# EAGLE board CT_schematic (EAGLE 7.6.0)

Size 100 x 80 mm. Coordinates in mm from the lower left corner, seen from the top.
Outline: 0,0 100,0 100,80 0,80 0,0
Copper layers (1*16): Top 0.035mm / dielectric 1.5mm / Bottom 0.035mm
Design rules "default": minimum track width 10mil, minimum drill 24mil, track to track 8mil, track to pad 8mil, pad to pad 8mil, via to via 8mil, smd to smd 8mil, copper to edge 40mil, drill to drill 8mil, minimum pad ring 10mil, minimum via ring 8mil, stop-mask expansion 4mil, vias tented up to drill 0mil, thermal gap 10mil

## Footprints (pad centres in the part's own frame; a part is rotated, then mirrored left to right if it is on the bottom)
C0603 = smd 0.8 x 0.8: 1 -0.762,0; 2 0.762,0
C0402 = smd 0.5 x 0.5: 1 -0.508,0; 2 0.508,0
C1206 = smd 1.3 x 1.6: 1 -1.524,0; 2 1.524,0
C0805 = smd 1.2 x 1.3: 1 -1.016,0; 2 1.016,0
EXV-9H = smd 3.505 x 1.676: 1 -2.857,0; 2 2.857,0
L0603 = smd 0.8 x 0.8: 1 -0.762,0; 2 0.762,0
PJ-037B_PACKAGE = drill 3.7 square: 1 12,0 | drill 3.2 square: 2 6,0
R0603 = smd 0.8 x 0.8: 1 -0.762,0; 2 0.762,0
LQFP48 = smd 0.3 x 1.2: 1 -2.75,-4.25; 2 -2.25,-4.25; 3 -1.75,-4.25; 4 -1.25,-4.25; 5 -0.75,-4.25; 6 -0.25,-4.25; 7 0.25,-4.25; 8 0.75,-4.25; 9 1.25,-4.25; 10 1.75,-4.25; 11 2.25,-4.25; 12 2.75,-4.25; 25 2.75,4.25; 26 2.25,4.25; 27 1.75,4.25; 28 1.25,4.25; 29 0.75,4.25; 30 0.25,4.25; 31 -0.25,4.25; 32 -0.75,4.25; 33 -1.25,4.25; 34 -1.75,4.25; 35 -2.25,4.25; 36 -2.75,4.25 | smd 1.2 x 0.3: 13 4.25,-2.75; 14 4.25,-2.25; 15 4.25,-1.75; 16 4.25,-1.25; 17 4.25,-0.75; 18 4.25,-0.25; 19 4.25,0.25; 20 4.25,0.75; 21 4.25,1.25; 22 4.25,1.75; 23 4.25,2.25; 24 4.25,2.75; 37 -4.25,2.75; 38 -4.25,2.25; 39 -4.25,1.75; 40 -4.25,1.25; 41 -4.25,0.75; 42 -4.25,0.25; 43 -4.25,-0.25; 44 -4.25,-0.75; 45 -4.25,-1.25; 46 -4.25,-1.75; 47 -4.25,-2.25; 48 -4.25,-2.75
SOIC-8 = smd 1.6 x 0.6: 1 -2.7,1.905 | smd 1.55 x 0.6: 2 -2.7,0.635; 3 -2.7,-0.635; 4 -2.7,-1.905; 5 2.7,-1.905; 6 2.7,-0.635; 7 2.7,0.635; 8 2.7,1.905
SAMTEC_FTSH-105-01-L-DV-K = smd 0.762 x 2.794: 1 -2.54,-2.032; 2 -2.54,2.032; 3 -1.27,-2.032; 4 -1.27,2.032; 5 0,-2.032; 6 0,2.032; 7 1.27,-2.032; 8 1.27,2.032; 9 2.54,-2.032; 10 2.54,2.032
ABS07-32.768KHZ-7-T = smd 1.1 x 2.4: 1 -2.5,0; 2 0,0
ASDMB-XX.XXXXMHZ-XX-XX-XXX = smd 0.65 x 0.85: 1 0.45,0.2; 2 2.05,0.2; 3 2.05,1.8; 4 0.45,1.8
WSON-8 = smd 0.3 x 0.6: 1 -0.75,0; 2 0.05,0; 3 0.85,0; 4 1.65,0; 5 1.65,3.8; 6 0.85,3.8; 7 0.05,3.8; 8 -0.75,3.8 | smd 3 x 2.6: PAD 0.45,1.9
SON-6 = smd 0.55 x 0.3: 1 -0.355,0.5 | smd 0.52 x 0.3: 2 -0.37,0; 3 -0.37,-0.5; 4 0.37,-0.5; 5 0.37,0; 6 0.37,0.5
SW_4-1437565-2 = smd 1.4 x 2.1: 1 -2.23,4.55; 2 -2.23,-4.55; 3 2.23,4.55; 4 2.23,-4.55
LGM67K-G1J2-24-Z = smd 0.8 x 1.4: A -2,0; C 0,0
NC7SZ125M5X = smd 1.3 x 0.7: 1 -1.3,0.95; 2 -1.3,0; 3 -1.3,-0.95; 4 1.3,-0.95; 5 1.3,0.95
DUMMY_PACKAGE_132 = drill 0.3: 1 0,-1; 2 1.5,-1; 3 3,-1

## Placement (x,y rotation side)
C1  1e-06  [C0603]  -19.05,66.04 0 top  (outside the outline)
C2  1e-07  [C0603]  -22.86,66.04 0 top  (outside the outline)
C3  1e-07  [C0603]  -26.67,66.04 0 top  (outside the outline)
C4  1e-07  [C0603]  -30.48,66.04 0 top  (outside the outline)
C5  1e-07  [C0603]  -34.29,66.04 0 top  (outside the outline)
C6  1e-07  [C0603]  -38.1,66.04 0 top  (outside the outline)
C7  4.7e-06  [C0603]  -15.24,66.04 0 top  (outside the outline)
C8  1e-08  [C0603]  -41.91,66.04 0 top  (outside the outline)
C9  1e-06  [C0603]  -45.72,66.04 0 top  (outside the outline)
C10  1e-11  [C0402]  -22.86,71.12 0 top  (outside the outline)
C11  1e-11  [C0402]  -26.67,71.12 0 top  (outside the outline)
C12  1e-08  [C0402]  -30.48,71.12 0 top  (outside the outline)
C13  1e-08  [C0402]  -34.29,71.12 0 top  (outside the outline)
C14  1e-07  [C0402]  -38.1,71.12 0 top  (outside the outline)
C15  1e-08  [C0402]  -41.91,71.12 0 top  (outside the outline)
C16  1e-08  [C0402]  -45.72,71.12 0 top  (outside the outline)
C17  1e-05  [C1206]  -59.69,46.99 0 top  (outside the outline)
C18  1e-05  [C0805]  -21.59,54.61 0 top  (outside the outline)
C19  1e-07  [C0402]  -49.53,71.12 0 top  (outside the outline)
C20  0.0001  [EXV-9H]  -52.07,38.1 0 top  (outside the outline)
C21  0.0001  [EXV-9H]  -17.78,48.26 0 top  (outside the outline)
C22  1e-08  [C0402]  -53.34,71.12 0 top  (outside the outline)
C23  1e-08  [C0402]  -57.15,71.12 0 top  (outside the outline)
F1  240.0  [L0603]  -49.53,66.04 0 top  (outside the outline)
J1  PJ-037B  [PJ-037B_PACKAGE]  -63.5,7.62 0 top  (outside the outline)
R1  10000.0  [R0603]  -41.91,54.61 0 top  (outside the outline)
R2  1000.0  [R0603]  -53.34,66.04 0 top  (outside the outline)
R3  910.0  [R0603]  -57.15,66.04 0 top  (outside the outline)
R4  4700.0  [R0603]  -60.96,66.04 0 top  (outside the outline)
R5  10000.0  [R0603]  -46.99,54.61 0 top  (outside the outline)
R6  10000.0  [R0603]  -52.07,54.61 0 top  (outside the outline)
R7  10000.0  [R0603]  -57.15,54.61 0 top  (outside the outline)
R8  10000.0  [R0603]  -62.23,54.61 0 top  (outside the outline)
R9  10000.0  [R0603]  -15.24,60.96 0 top  (outside the outline)
R10  10000.0  [R0603]  -20.32,60.96 0 top  (outside the outline)
R11  10000.0  [R0603]  -25.4,60.96 0 top  (outside the outline)
R12  10000.0  [R0603]  -30.48,60.96 0 top  (outside the outline)
R13  10000.0  [R0603]  -35.56,60.96 0 top  (outside the outline)
R14  10000.0  [R0603]  -40.64,60.96 0 top  (outside the outline)
R15  10000.0  [R0603]  -45.72,60.96 0 top  (outside the outline)
R16  10000.0  [R0603]  -50.8,60.96 0 top  (outside the outline)
R17  5.0  [R0603]  -64.77,66.04 0 top  (outside the outline)
R18  100000.0  [R0603]  -26.67,54.61 0 top  (outside the outline)
R19  806.0  [R0603]  -15.24,71.12 0 top  (outside the outline)
R20  1000.0  [R0603]  -19.05,71.12 0 top  (outside the outline)
R21  10000.0  [R0603]  -55.88,60.96 0 top  (outside the outline)
R22  10000.0  [R0603]  -60.96,60.96 0 top  (outside the outline)
R23  82000.0  [R0603]  -66.04,60.96 0 top  (outside the outline)
R24  300000.0  [R0603]  -31.75,54.61 0 top  (outside the outline)
R25  120000.0  [R0603]  -36.83,54.61 0 top  (outside the outline)
U1  STM32F378CCT6  [LQFP48]  -44.45,27.94 0 top  (outside the outline)
U2  AT25160B-SSHL-T  [SOIC-8]  -60.96,26.67 0 top  (outside the outline)
U3  AT25512N-SH-T  [SOIC-8]  -22.86,39.37 0 top  (outside the outline)
U4  FTSH-105-01-L-DV-K  [SAMTEC_FTSH-105-01-L-DV-K]  -41.91,7.62 0 top  (outside the outline)
U5  ABS07-32.768KHZ-7-T  [ABS07-32.768KHZ-7-T]  -39.37,48.26 0 top  (outside the outline)
U6  ASDMB-25.000MHZ-EC-T  [ASDMB-XX.XXXXMHZ-XX-XX-XXX]  -16.51,1.27 0 top  (outside the outline)
U7  LP3878SDX-ADJ/NOPB  [WSON-8]  -44.45,36.83 0 top  (outside the outline)
U8  TPS3895ADRYR  [SON-6]  -13.97,74.93 0 top  (outside the outline)
U9  4-1437565-2  [SW_4-1437565-2]  -27.94,27.94 0 top  (outside the outline)
U10  Q65110A2395  [LGM67K-G1J2-24-Z]  -48.26,46.99 0 top  (outside the outline)
U11  nc7sz125m5x  [NC7SZ125M5X]  -64.77,45.72 0 top  (outside the outline)
U12  nc7sz125m5x  [NC7SZ125M5X]  -15.24,54.61 0 top  (outside the outline)
U13  Dummy  [DUMMY_PACKAGE_132]  -63.5,71.12 0 top  (outside the outline)

## Library data of the parts
C1-C23 F1 J1 R1-R25 U1-U13 = circuit_tree

## Nets
CLK_CRYSTAL_U1_3: C10.1 U1.3 U5.1
CLK_CRYSTAL_U1_4: C11.1 U1.4 U5.2
CLK_U1_5: U1.5 U6.3
GND: C1.2 C2.2 C3.2 C4.2 C5.2 C6.2 C7.2 C8.2 C9.2 C10.2 C11.2 C12.2 C13.2 C14.2 C15.2 C16.2 C17.2 C18.2 C19.2 C20.2 C21.2 C22.2 C23.2 J1.2 R2.2 R5.2 R6.2 R16.2 R17.2 R20.2 R23.2 R25.2 U1.8 U1.23 U1.47 U2.4 U3.4 U4.3 U4.5 U6.2 U7.3 U7.PAD U8.2 U10.C U11.2 U11.3 U12.1 U12.3 U13.1
NET_U1_7: R4.1 U1.7 U12.4
NET_U1_9: C8.1 C9.1 F1.1 U1.9 U1.24
NET_U1_20: R6.1 U1.20
NET_U1_24: U1.24
NET_U1_25: U1.25
NET_U1_44: R5.1 U1.44
NET_U1_45: R3.1 U1.45 U10.A
NET_U1_46: R1.1 U1.46 U9.3 U9.4
NET_U2_3: R7.1 U2.3
NET_U2_7: R9.1 U2.7
NET_U3_3: R10.1 U3.3
NET_U3_7: R12.1 U3.7
NET_U4_9: R17.1 U4.9
NET_U7_1: C16.1 U7.1
NET_U7_6: R19.2 R20.1 U7.6
NET_U7_8: R18.1 U7.8
NET_U8_1: R22.1 R23.1 U8.1
NET_U8_3: R24.2 R25.1 U8.3
NET_U8_4: R21.1 U8.4 U11.4 U12.2
NET_U9_1: R2.1 U9.1 U9.2
PROC_ADC1_IN1: U1.11 U13.3
PROC_ADC1_IN2: U1.12 U13.2
PROC_SPI1_MISO: U1.16 U3.2
PROC_SPI1_MOSI: U1.18 U3.5
PROC_SPI1_NSS: R11.1 U1.14 U3.1
PROC_SPI1_SCK: U1.15 U3.6
PROC_SPI2_MISO: U1.26 U2.2
PROC_SPI2_MOSI: U1.27 U2.5
PROC_SPI2_NSS: R8.1 U1.32 U2.1
PROC_SPI2_SCK: U1.28 U2.6
PROC_SYS_JTCK_SWCLK: R16.1 U1.37 U4.4
PROC_SYS_JTDI: R14.1 U1.38 U4.8
PROC_SYS_JTDO_TRACESWO: U1.39 U4.6
PROC_SYS_JTMS_SWDIO: R15.1 U1.34 U4.2
RST_OUT_U4_JTAG_RST_B: R13.1 U4.10 U11.1
VCC_S1_9V8: C17.1 C20.1 C21.1 J1.1 R18.2 U7.4
VCC_TIER1_1V8: C1.1 C2.1 C3.1 C4.1 C5.1 C6.1 C7.1 C12.1 C13.1 C14.1 C15.1 C18.1 C19.1 C22.1 C23.1 F1.2 R1.2 R3.2 R4.2 R7.2 R8.2 R9.2 R10.2 R11.2 R12.2 R13.2 R14.2 R15.2 R19.1 R21.2 R22.2 R24.1 U1.1 U1.17 U1.48 U2.8 U3.8 U4.1 U6.4 U7.5 U8.6 U11.5 U12.5

## Tracks (layer width: path | path; a pad name or v marks a point on that pad's centre or on a via)
CLK_CRYSTAL_U1_3  (2 unrouted)
CLK_CRYSTAL_U1_4  (2 unrouted)
CLK_U1_5  (1 unrouted)
GND  (48 unrouted)
NET_U1_7  (2 unrouted)
NET_U1_9  (4 unrouted)
NET_U1_20  (1 unrouted)
NET_U1_44  (1 unrouted)
NET_U1_45  (2 unrouted)
NET_U1_46  (3 unrouted)
NET_U2_3  (1 unrouted)
NET_U2_7  (1 unrouted)
NET_U3_3  (1 unrouted)
NET_U3_7  (1 unrouted)
NET_U4_9  (1 unrouted)
NET_U7_1  (1 unrouted)
NET_U7_6  (2 unrouted)
NET_U7_8  (1 unrouted)
NET_U8_1  (2 unrouted)
NET_U8_3  (2 unrouted)
NET_U8_4  (3 unrouted)
NET_U9_1  (2 unrouted)
PROC_ADC1_IN1  (1 unrouted)
PROC_ADC1_IN2  (1 unrouted)
PROC_SPI1_MISO  (1 unrouted)
PROC_SPI1_MOSI  (1 unrouted)
PROC_SPI1_NSS  (2 unrouted)
PROC_SPI1_SCK  (1 unrouted)
PROC_SPI2_MISO  (1 unrouted)
PROC_SPI2_MOSI  (1 unrouted)
PROC_SPI2_NSS  (2 unrouted)
PROC_SPI2_SCK  (1 unrouted)
PROC_SYS_JTCK_SWCLK  (2 unrouted)
PROC_SYS_JTDI  (2 unrouted)
PROC_SYS_JTDO_TRACESWO  (1 unrouted)
PROC_SYS_JTMS_SWDIO  (2 unrouted)
RST_OUT_U4_JTAG_RST_B  (2 unrouted)
VCC_S1_9V8  (5 unrouted)
VCC_TIER1_1V8  (42 unrouted)